# Altium PCB Flight_Computer_1.PcbDoc (part 2 of 4)
Units mm, origin at the board's own origin, x right, y up, seen from the top; angles counter-clockwise.
Board outline 101.6 x 76.2 mm, 4 copper layers (Top Layer, GND, 3.3V, Bottom Layer), stack 1.574 mm thick; 111 components, 86 nets, 493 pads, 1677 vias.
Unrouted connection lines stored in the file: 302.
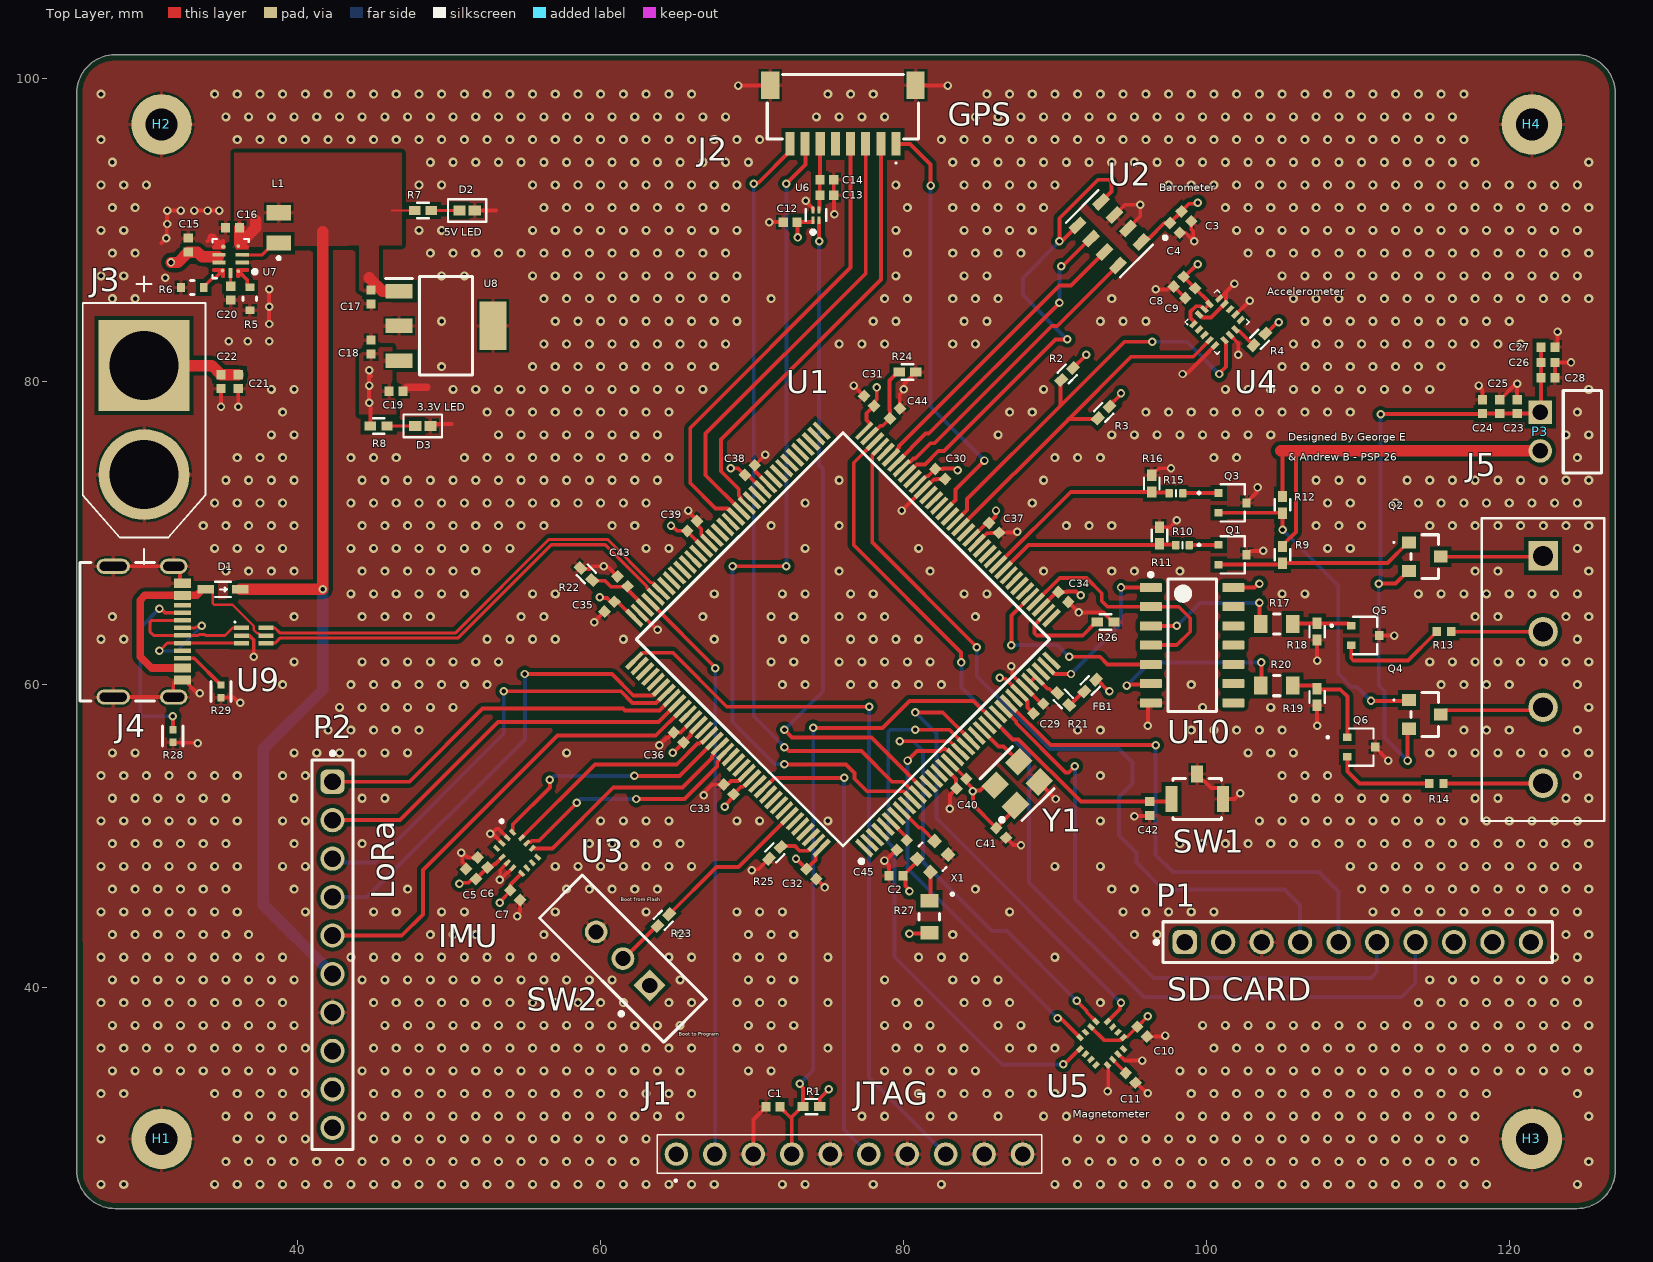
[diagram p0: Top Layer view]

## Part data (continued)
D1: library part D_Schotty_Diode, "Diode Small Signal Schottky 10V 3A Automotive 2-Pin SOD-323 T/R", Average Rectified Current=3A, Forward Voltage=320mV, LCSC Part #=C133103, Manufacturer=STMicroelectronics, Max Forward Surge Current (Ifsm)=5A, Max Junction Temperature (Tj)=150°C, Max Power Dissipation=310mW, Max Repetitive Reverse Voltage (Vrrm)=10V, Max Reverse Leakage Current=7.5µA, Min Operating Temperature=-65°C, Peak Reverse Current=2.5µA, Supplier Part Number=497-3707-1-ND, Category="Schottky Diodes", China RoHS=Compliant, ComponentLink1Description=https://datasheet.octopart.com:443/BAT60JFILM-STMicroelectronics-datasheet-56177.pdf?src-supplier=STMicroelectronics, ComponentLink1URL=https://datasheet.octopart.com:443/BAT60JFILM-STMicroelectronics-datasheet-56177.pdf?src-supplier=STMicroelectronics, ComponentLink2Description=https://datasheet.octopart.com:443/BAT60JFILM-STMicroelectronics-datasheet-12532682.pdf?src-supplier=TME, ComponentLink2URL=https://datasheet.octopart.com:443/BAT60JFILM-STMicroelectronics-datasheet-12532682.pdf?src-supplier=TME, ComponentLink3Description=https://datasheet.octopart.com:443/BAT60JFILM-STMicroelectronics-datasheet-181242469.pdf?src-supplier=Newark, ComponentLink3URL=https://datasheet.octopart.com:443/BAT60JFILM-STMicroelectronics-datasheet-181242469.pdf?src-supplier=Newark, ComponentLink4Description=https://datasheet.octopart.com:443/BAT60JFILM-STMicroelectronics-datasheet-14054140.pdf?src-supplier=iiiC, ComponentLink4URL=https://datasheet.octopart.com:443/BAT60JFILM-STMicroelectronics-datasheet-14054140.pdf?src-supplier=iiiC, Contact Plating=Tin, Current Rating=3A, Element Configuration=Single, Forward Current=3A, Height=1.17mm, Lead Free="Lead Free", Length=1.8mm, Lifecycle Status=Production, Manufacturer Part Number=BAT60JFILM, Max Operating Temperature=150°C, Max Output current=3A, Max Reverse Voltage (DC)=10V, Max Surge Current=5A, Mounting Technology="Surface Mount", Number of Elements=1, Number of Terminals=2, Output Current=3A, Packaging="Tape and Reel", Peak Non-Repetitive Surge Current=5A, Pins=2, Polarity=Standard, Pricing="1=0.29, 10=0.14, 100=0.1213, 500=0.08962, 1000=0.07938 (USD)", Radiation Hardening=No, REACH SVHC=Yes, Reverse Standoff Voltage=10V, RoHS=Compliant, Schedule B="8541100080, 8541100080|8541100080|8541100080|8541100080|8541100080|8541100080|8541100080|8541100080|8541100080|8541100080|8541100080|8541100080|8541100080|8541100080|8541100080|8541100080|8541100080|8541100080|8541100080|8541100080|8541100080|8541100080|8541100080|85", Stock=96297, Supplier=DigiKey, Voltage Rating (DC)=10V, Weight=4.535924g, Width=1.45mm
D2: library part D_RED_LED, "RED LED", LCSC Part #=C397045
D3: library part D_GREEN_LED, "Green LED", LCSC Part #=C434446
FB1: library part FB_0402, "Ferrite Beads Multi-Layer 600Ohm 25% 100MHz 300mA 520mOhm DCR 0402 Paper T/R", Case Code (Imperial)=0402, Case Code (Metric)=1005, Clock Frequency=100MHz, Current Rating=300mA, DC Resistance (DCR)=520mΩ, LCSC Part #=C76884, Manufacturer="Murata Electronics", Manufacturer Part Number=BLM15AG601SN1D, Max Operating Temperature=125°C, Min Operating Temperature=-55°C, Supplier Part Number=490-1006-1-ND, Tolerance=25%, Case/Package=0402, Category="Ferrite Beads and Chips", ComponentLink1Description=https://datasheet.octopart.com:443/BLM15AG601SN1D-Murata-datasheet-180806368.pdf?src-supplier=Newark, ComponentLink1URL=https://datasheet.octopart.com:443/BLM15AG601SN1D-Murata-datasheet-180806368.pdf?src-supplier=Newark, ComponentLink2Description=https://datasheet.octopart.com:443/BLM15AG601SN1D-Murata-datasheet-12522583.pdf?src-supplier=Upverter, ComponentLink2URL=https://datasheet.octopart.com:443/BLM15AG601SN1D-Murata-datasheet-12522583.pdf?src-supplier=Upverter, ComponentLink3Description=https://datasheet.octopart.com:443/BLM15AG601SN1D-Murata-datasheet-10083551.pdf?src-supplier=Upverter, ComponentLink3URL=https://datasheet.octopart.com:443/BLM15AG601SN1D-Murata-datasheet-10083551.pdf?src-supplier=Upverter, ComponentLink4Description=https://datasheet.octopart.com:443/BLM15AG601SN1D-Murata-datasheet-8508678.pdf?src-supplier=Upverter, ComponentLink4URL=https://datasheet.octopart.com:443/BLM15AG601SN1D-Murata-datasheet-8508678.pdf?src-supplier=Upverter, ComponentLink5Description=https://datasheet.octopart.com:443/BLM15AG601SN1D-Murata-datasheet-70271.pdf?src-supplier=element14+APAC, ComponentLink5URL=https://datasheet.octopart.com:443/BLM15AG601SN1D-Murata-datasheet-70271.pdf?src-supplier=element14+APAC, ComponentLink6Description=https://datasheet.octopart.com:443/BLM15AG601SN1D-Murata-datasheet-11772092.pdf?src-supplier=Future+Electronics, ComponentLink6URL=https://datasheet.octopart.com:443/BLM15AG601SN1D-Murata-datasheet-11772092.pdf?src-supplier=Future+Electronics, ComponentLink7Description=https://datasheet.octopart.com:443/BLM15AG601SN1D-Murata-datasheet-13536432.pdf?src-supplier=Future+Electronics, ComponentLink7URL=https://datasheet.octopart.com:443/BLM15AG601SN1D-Murata-datasheet-13536432.pdf?src-supplier=Future+Electronics, ComponentLink8Description=https://datasheet.octopart.com:443/BLM15AG601SN1D-Murata-datasheet-79879196.pdf?src-supplier=Future+Electronics, ComponentLink8URL=https://datasheet.octopart.com:443/BLM15AG601SN1D-Murata-datasheet-79879196.pdf?src-supplier=Future+Electronics, ComponentLink9Description=https://datasheet.octopart.com:443/BLM15AG601SN1D-Murata-datasheet-13563506.pdf?src-supplier=Future+Electronics, ComponentLink9URL=https://datasheet.octopart.com:443/BLM15AG601SN1D-Murata-datasheet-13563506.pdf?src-supplier=Future+Electronics, ComponentLink10Description=https://datasheet.octopart.com:443/BLM15AG601SN1D-Murata-datasheet-12545319.pdf?src-supplier=Future+Electronics, ComponentLink10URL=https://datasheet.octopart.com:443/BLM15AG601SN1D-Murata-datasheet-12545319.pdf?src-supplier=Future+Electronics, ComponentLink11Description=https://datasheet.octopart.com:443/BLM15AG601SN1D-Murata-datasheet-141257741.pdf?src-supplier=Ciiva, ComponentLink11URL=https://datasheet.octopart.com:443/BLM15AG601SN1D-Murata-datasheet-141257741.pdf?src-supplier=Ciiva, ComponentLink12Description=https://datasheet.octopart.com:443/BLM15AG601SN1D-Murata-datasheet-138706486.pdf?src-supplier=Ciiva, ComponentLink12URL=https://datasheet.octopart.com:443/BLM15AG601SN1D-Murata-datasheet-138706486.pdf?src-supplier=Ciiva, ComponentLink13Description=https://datasheet.octopart.com:443/BLM15AG601SN1D-Murata-datasheet-155367977.pdf?src-supplier=TME, ComponentLink13URL=https://datasheet.octopart.com:443/BLM15AG601SN1D-Murata-datasheet-155367977.pdf?src-supplier=TME, ComponentLink14Description=https://datasheet.octopart.com:443/BLM15AG601SN1D-Murata-datasheet-65816644.pdf?src-supplier=TME, ComponentLink14URL=https://datasheet.octopart.com:443/BLM15AG601SN1D-Murata-datasheet-65816644.pdf?src-supplier=TME, ComponentLink15Description=https://datasheet.octopart.com:443/BLM15AG601SN1D-Murata-datasheet-102761981.pdf?src-supplier=Megastar, ComponentLink15URL=https://datasheet.octopart.com:443/BLM15AG601SN1D-Murata-datasheet-102761981.pdf?src-supplier=Megastar, ComponentLink16Description=https://datasheet.octopart.com/BLM15AG601SN1D-Murata-datasheet-37129980.pdf, ComponentLink16URL=https://datasheet.octopart.com/BLM15AG601SN1D-Murata-datasheet-37129980.pdf, ComponentLink17Description=https://datasheet.octopart.com:443/BLM15AG601SN1D-Murata-datasheet-14066398.pdf?src-supplier=iiiC, ComponentLink17URL=https://datasheet.octopart.com:443/BLM15AG601SN1D-Murata-datasheet-14066398.pdf?src-supplier=iiiC, ComponentLink18Description=http://sigma.octopart.com:80/reach_statement/Murata-company-16.pdf?src-supplier=Compliance+Statements, ComponentLink18URL=http://sigma.octopart.com:80/reach_statement/Murata-company-16.pdf?src-supplier=Compliance+Statements, Core Material=Ferrite, DC Current=300mA, Depth=550µm, ESR=520mΩ, Frequency=100MHz, Height=500µm, Impedance=600Ω, Lead Free="Lead Free", Length=1mm, Lifecycle Status=Production, Material="Ferrite, Steel", Max Current Rating=300mA, Max DC Current=300mA, Military Standard=Not, Number of Circuits=1, Number of Lines=1, Number of Terminals=2, Packaging="Tape and Reel", Pins=2, Pricing="1=0.1, 10=0.043, 25=0.0376, 50=0.034, 100=0.0305, 250=0.02632, 500=0.02346, 1000=0.02083, 5000=0.01546, 10000=0.01341, 20000=0.01188 (USD)", Radiation Hardening=No, REACH SVHC=Yes, RMS Current (Irms)=300mA, RoHS=Compliant, Schedule B="8504500000, 8504500000|8504500000, 8504500000|8504500000|8504500000, 8504500000|8504500000|8504500000|8504500000", Shielding=Unshielded, Stock=347218, Supplier=DigiKey, Termination=SMD/SMT, Test Frequency=100MHz, Width=500µm
H1 H2 H3 H4: library part "M2 Mounting Hole", "2mm M2 Mounting Hole"
J1: "CONN HEADER VERT 10POS 2.54MM", Color=Black, LCSC Part #=C7128266, Manufacturer=Samtec, Manufacturer Lifecycle Status=PRODUCTION, Manufacturer_Name=SAMTEC, Max Current Rating=7.6A, Max Operating Temperature=105°C, Max Voltage Rating (AC)=550V, Min Operating Temperature=-55°C, Mouser Part Number=200-TSW11007TS, Supplier Part Number=SAM1035-10-ND, Arrow Part Number=TSW-110-07-T-S, Arrow Price/Stock=https://www.arrow.com/en/products/tsw-110-07-t-s/samtec?region=nac, Category="Headers and Wire Housings", ComponentLink1Description=https://datasheet.octopart.com:443/TSW-110-07-T-S-Samtec-datasheet-151455181.pdf?src-supplier=Upverter, ComponentLink1URL=https://datasheet.octopart.com:443/TSW-110-07-T-S-Samtec-datasheet-151455181.pdf?src-supplier=Upverter, ComponentLink2Description=https://sigma.octopart.com:443/14433679/technical_drawing/Samtec-TSW-110-07-T-S.pdf?src-supplier=Upverter, ComponentLink2URL=https://sigma.octopart.com:443/14433679/technical_drawing/Samtec-TSW-110-07-T-S.pdf?src-supplier=Upverter, ComponentLink3Description=https://datasheet.octopart.com:443/TSW-110-07-T-S-Samtec-datasheet-97325576.pdf?src-supplier=Sager+Electronics, ComponentLink3URL=https://datasheet.octopart.com:443/TSW-110-07-T-S-Samtec-datasheet-97325576.pdf?src-supplier=Sager+Electronics, ComponentLink4Description=https://sigma.octopart.com:443/97325577/technical_drawing/Samtec-TSW-110-07-T-S.pdf?src-supplier=Samtec, ComponentLink4URL=https://sigma.octopart.com:443/97325577/technical_drawing/Samtec-TSW-110-07-T-S.pdf?src-supplier=Samtec, ComponentLink5Description=https://datasheet.octopart.com:443/TSW-110-07-T-S-Samtec-datasheet-62107121.pdf?src-supplier=element14+APAC, ComponentLink5URL=https://datasheet.octopart.com:443/TSW-110-07-T-S-Samtec-datasheet-62107121.pdf?src-supplier=element14+APAC, ComponentLink6Description=https://datasheet.octopart.com:443/TSW-110-07-T-S-Samtec-datasheet-136646178.pdf?src-supplier=Master+Electronics, ComponentLink6URL=https://datasheet.octopart.com:443/TSW-110-07-T-S-Samtec-datasheet-136646178.pdf?src-supplier=Master+Electronics, ComponentLink7Description=https://datasheet.octopart.com:443/TSW-110-07-T-S-Samtec-datasheet-118235302.pdf?src-supplier=Electro+Sonic, ComponentLink7URL=https://datasheet.octopart.com:443/TSW-110-07-T-S-Samtec-datasheet-118235302.pdf?src-supplier=Electro+Sonic, ComponentLink8Description=https://datasheet.octopart.com:443/TSW-110-07-T-S-Samtec-datasheet-180258786.pdf?src-supplier=JRH+Electronics, ComponentLink8URL=https://datasheet.octopart.com:443/TSW-110-07-T-S-Samtec-datasheet-180258786.pdf?src-supplier=JRH+Electronics, ComponentLink9Description=https://datasheet.octopart.com:443/TSW-110-07-T-S-Samtec-datasheet-164324425.pdf?src-supplier=Newark, ComponentLink9URL=https://datasheet.octopart.com:443/TSW-110-07-T-S-Samtec-datasheet-164324425.pdf?src-supplier=Newark, ComponentLink10Description=https://datasheet.octopart.com:443/TSW-110-07-T-S-Samtec-datasheet-11047283.pdf?src-supplier=Newark, ComponentLink10URL=https://datasheet.octopart.com:443/TSW-110-07-T-S-Samtec-datasheet-11047283.pdf?src-supplier=Newark, ComponentLink11Description=https://datasheet.octopart.com:443/TSW-110-07-T-S-Samtec-datasheet-160657603.pdf?src-supplier=Toby+Electronics, ComponentLink11URL=https://datasheet.octopart.com:443/TSW-110-07-T-S-Samtec-datasheet-160657603.pdf?src-supplier=Toby+Electronics, ComponentLink12Description=https://datasheet.octopart.com:443/TSW-110-07-T-S-Samtec-datasheet-116539033.pdf?src-supplier=Toby+Electronics, ComponentLink12URL=https://datasheet.octopart.com:443/TSW-110-07-T-S-Samtec-datasheet-116539033.pdf?src-supplier=Toby+Electronics, ComponentLink13Description=https://datasheet.octopart.com:443/TSW-110-07-T-S-Samtec-datasheet-116536310.pdf?src-supplier=Toby+Electronics, ComponentLink13URL=https://datasheet.octopart.com:443/TSW-110-07-T-S-Samtec-datasheet-116536310.pdf?src-supplier=Toby+Electronics, ComponentLink14Description=https://datasheet.octopart.com/TSW-110-07-T-S-Samtec-datasheet-86818365.pdf, ComponentLink14URL=https://datasheet.octopart.com/TSW-110-07-T-S-Samtec-datasheet-86818365.pdf, ComponentLink15Description=https://datasheet.octopart.com:443/TSW-110-07-T-S-Samtec-datasheet-11542832.pdf?src-supplier=Arrow+Electronics, ComponentLink15URL=https://datasheet.octopart.com:443/TSW-110-07-T-S-Samtec-datasheet-11542832.pdf?src-supplier=Arrow+Electronics, ComponentLink16Description=https://datasheet.octopart.com:443/TSW-110-07-T-S-Samtec-datasheet-5313500.pdf?src-supplier=_legacy+Avnet, ComponentLink16URL=https://datasheet.octopart.com:443/TSW-110-07-T-S-Samtec-datasheet-5313500.pdf?src-supplier=_legacy+Avnet, Connector Type="Male Pin", Contact Material="Nickel, Tin", Contact Mating Length=5.842mm, Contact Plating=Tin, Datasheet Link=https://www.samtec.com/partnumber/TSW-110-07-T-S, Depth=2.54mm, Gender=Male, Height=8.71mm, Housing Color=Black, Housing Material=Polyester, Lead Free="Lead Free", Lead Pitch=2.54mm, Length=25.4mm, Lifecycle Status=Production, Manufacturer Part Number=TSW-110-07-T-S, Manufacturer_Part_Number=TSW-110-07-T-S, Mounting Technology="Through Hole", Mouser Price/Stock=https://www.mouser.co.uk/ProductDetail/Samtec/TSW-110-07-T-S?qs=rU5fayqh%252BE03fU8gEqe7bw%3D%3D, Number of Contacts=10, Number of Positions=10, Number of Rows=1, Orientation=Straight, Packaging=Bulk, Pins=10, Pitch=2.54mm, Pricing="1=0.76, 10=0.645, 100=0.5476, 500=0.48878, 1000=0.46544, 5000=0.43876 (USD)", Radiation Hardening=No, REACH SVHC=No, RoHS=Compliant, Stock=1480, Supplier=DigiKey, Termination=Solder, Width=2.54mm
J2: library part SM08B-SRSS-TB_LF__SN_, "CONN HEADER SMD R/A 8POS 1MM", Arrow Part Number=SM08B-SRSS-TB(LF)(SN), Color=Natural, Contact Resistance=40mΩ, Current Rating=1A, Dielectric Material=Polyamide, Flammability Rating="UL94 V-0", Insulation Resistance=100MΩ, LCSC Part #=C160407, Manufacturer=JST, Manufacturer_Name="JST (JAPAN SOLDERLESS TERMINALS)", Max Operating Temperature=85°C, Min Operating Temperature=-25°C, Mouser Part Number=N/A, Supplier Part Number=306-SM08BSRSSTBLFSN, Voltage Rating=50V, Arrow Price/Stock=https://www.arrow.com/en/products/sm08b-srss-tb-lf-sn/jst-manufacturing?utm_currency=USD&region=europe, Category="Headers and Wire Housings", China RoHS=Compliant, ComponentLink1Description=https://datasheet.octopart.com:443/SM08B-SRSS-TB%28LF%29%28SN%29-JST-datasheet-12489618.pdf?src-supplier=Upverter, ComponentLink1URL=https://datasheet.octopart.com:443/SM08B-SRSS-TB%28LF%29%28SN%29-JST-datasheet-12489618.pdf?src-supplier=Upverter, ComponentLink2Description=https://datasheet.octopart.com:443/SM08B-SRSS-TB%28LF%29%28SN%29-JST-datasheet-152738602.pdf?src-supplier=Upverter, ComponentLink2URL=https://datasheet.octopart.com:443/SM08B-SRSS-TB%28LF%29%28SN%29-JST-datasheet-152738602.pdf?src-supplier=Upverter, ComponentLink3Description=https://datasheet.octopart.com:443/SM08B-SRSS-TB%28LF%29%28SN%29-JST-datasheet-8330955.pdf?src-supplier=Upverter, ComponentLink3URL=https://datasheet.octopart.com:443/SM08B-SRSS-TB%28LF%29%28SN%29-JST-datasheet-8330955.pdf?src-supplier=Upverter, ComponentLink4Description=https://datasheet.octopart.com:443/SM08B-SRSS-TB%28LF%29%28SN%29-JST-datasheet-5322443.pdf?src-supplier=element14+APAC, ComponentLink4URL=https://datasheet.octopart.com:443/SM08B-SRSS-TB%28LF%29%28SN%29-JST-datasheet-5322443.pdf?src-supplier=element14+APAC, ComponentLink5Description=https://datasheet.octopart.com:443/SM08B-SRSS-TB%28LF%29%28SN%29-JST-datasheet-65849987.pdf?src-supplier=element14+APAC, ComponentLink5URL=https://datasheet.octopart.com:443/SM08B-SRSS-TB%28LF%29%28SN%29-JST-datasheet-65849987.pdf?src-supplier=element14+APAC, ComponentLink6Description=https://datasheet.octopart.com:443/SM08B-SRSS-TB%28LF%29%28SN%29-JST-datasheet-12513377.pdf?src-supplier=Future+Electronics, ComponentLink6URL=https://datasheet.octopart.com:443/SM08B-SRSS-TB%28LF%29%28SN%29-JST-datasheet-12513377.pdf?src-supplier=Future+Electronics, ComponentLink7Description=https://datasheet.octopart.com:443/SM08B-SRSS-TB/LF/SN-JST-datasheet-120967.pdf?src-supplier=Future+Electronics, ComponentLink7URL=https://datasheet.octopart.com:443/SM08B-SRSS-TB/LF/SN-JST-datasheet-120967.pdf?src-supplier=Future+Electronics, ComponentLink8Description=https://datasheet.octopart.com:443/SM08B-SRSS-TB-%28LF%29%28SN%29-JST-datasheet-44103209.pdf?src-supplier=TME, ComponentLink8URL=https://datasheet.octopart.com:443/SM08B-SRSS-TB-%28LF%29%28SN%29-JST-datasheet-44103209.pdf?src-supplier=TME, ComponentLink9Description=https://datasheet.octopart.com:443/SM08B-SRSS-TB%28LF%29%28SN%29-JST-datasheet-119911.pdf?src-supplier=DigiKey, ComponentLink9URL=https://datasheet.octopart.com:443/SM08B-SRSS-TB%28LF%29%28SN%29-JST-datasheet-119911.pdf?src-supplier=DigiKey, Connector Type="Male Pin", Contact Gender=Male, Contact Material="Copper, Tin", Contact Plating=Tin, Datasheet Link=https://www.jst-mfg.com/product/pdf/eng/eSH.pdf?681342af00cbd, Gender=Male, Height=2.95mm, Housing Color=Natural, Housing Material=Nylon, Lead Free="Lead Free", Lead Pitch=1mm, Lifecycle Status=Production, Manufacturer Part Number=SM08B-SRSS-TB(LF)(SN), Manufacturer_Part_Number=SM08B-SRSS-TB(LF)(SN), Material=Polyamide, Mounting Technology="Surface Mount", Mouser Price/Stock=https://www.mouser.co.uk/ProductDetail/JST-Commercial/SM08B-SRSS-TBLFSN?qs=QpmGXVUTftEPqGOAsnf4nQ%3D%3D, Number of Contacts=8, Number of Positions=8, Number of Rows=1, Packaging="Cut Tape", Pins=8, Pitch=990.6µm, Pricing="1=1.22, 10=1.08, 50=1.08, 100=0.922, 1000=0.813, 10000=0.691 (USD)", REACH SVHC=Yes, RoHS=Compliant, Stock=10177, Supplier=Mouser, Terminal Pitch=1mm, Termination=Solder, Voltage Rating (AC)=50V
J3: library part CMP-036-000000-1, "Plug; DC supply; XT60; male; PIN: 2; for cable; soldered; 30A; 500V", Package=Package, Check_prices=https://www.snapeda.com/parts/XT60-M/AMASS/view-part/?ref=eda, Component Type=Standard, Design Item ID=XT60-M, MF=AMASS, MP=XT60-M, Pin Count=2, SnapEDA_Link=https://www.snapeda.com/parts/XT60-M/AMASS/view-part/?ref=snap, Source=XT60-M.SchLib
J4: library part 217179-0001, "CONN RCP USB2.0 TYP C 24P SMD RA", LCSC Part #=C3197684, Manufacturer=Molex, Supplier Part Number=900-2171790001CT-ND, Category=Connectors, Manufacturer Part Number=217179-0001, Pricing="1=0.98, 10=0.731, 25=0.6564, 50=0.6074, 100=0.5642, 250=0.51468, 500=0.48234, 1200=0.44689, 2400=0.42258, 3600=0.40973, 6000=0.39484, 8400=0.38577, 12000=0.37675 (USD)", RoHS=No, Stock=11294, Supplier=Digikey
J5: library part CMP-028-000000-1, "TERM BLK 4POS SIDE ENTRY 5MM PCB", Current Rating=13.5A, LCSC Part Number=C3818021, Manufacturer="Phoenix Contact", Voltage Rating=250V, Category="Terminal Blocks", Component Type=Standard, ComponentLink1Description=https://datasheet.ciiva.com:443/pdfs/VipMasterIC/IC/PCON/PCON-S-A0009615323/PCON-S-A0009615323-1.pdf?src-supplier=IHS+Markit, ComponentLink1URL=https://datasheet.ciiva.com:443/pdfs/VipMasterIC/IC/PCON/PCON-S-A0009615323/PCON-S-A0009615323-1.pdf?src-supplier=IHS+Markit, ComponentLink2Description=https://datasheet.ciiva.com/824/1729034-824323.pdf?src-supplier=Digikey, ComponentLink2URL=https://datasheet.ciiva.com/824/1729034-824323.pdf?src-supplier=Digikey, ComponentLink3Description=https://datasheet.ciiva.com/16071/1729034-16071818.pdf?src-supplier=Onlinecomponents.com, ComponentLink3URL=https://datasheet.ciiva.com/16071/1729034-16071818.pdf?src-supplier=Onlinecomponents.com, ComponentLink4Description=https://datasheet.ciiva.com/15225/getdatasheetpartid-305793-15225961.pdf?src-supplier=Verical, ComponentLink4URL=https://datasheet.ciiva.com/15225/getdatasheetpartid-305793-15225961.pdf?src-supplier=Verical, ComponentLink5Description=https://datasheet.ciiva.com/14110/mkdsn-series-eng-bro-14110735.pdf?src-supplier=Distrelec, ComponentLink5URL=https://datasheet.ciiva.com/14110/mkdsn-series-eng-bro-14110735.pdf?src-supplier=Distrelec, ComponentLink6Description=https://datasheet.ciiva.com/14608/70054377-14608714.pdf?src-supplier=Allied+Electronics, ComponentLink6URL=https://datasheet.ciiva.com/14608/70054377-14608714.pdf?src-supplier=Allied+Electronics, Design Item ID=1729034, Fastening Method=SCREW, Manufacturer Part Number=1729034, Mounting Technology=Board, Number of Decks=1, Number of Rows=1, Number of Ways=4, Pin Count=4, Pricing="1=2.26, 10=2.162, 50=2.068, 100=2.0116, 250=1.88, 500=1.7296, 1000=1.59801, 2500=1.5275 (USD)", Reach SVHC Compliant=No, RoHS=Yes, RoHS Compliant=Yes, Safety Approval=UL, Source=Hybrids_Avionics.SCHLIB, Stock=23266, Terminal and Terminal Block Type="BARRIER STRIP TERMINAL BLOCK", Wire Cross Section=1.5mm2, Wire/Cable Gauge=16AWG
L1: library part L_1uH_2016, "FIXED IND 1UH 1.7A 128 MOHM SMD", Ambient Temperature Range High=85°C, Case/Package=0806, Current Rating=1.7A, DC Resistance (DCR)=140mΩ, Inductance Tolerance=20%, LCSC Part #=C560043, Manufacturer=Murata, Manufacturer Lifecycle Status="IN PRODUCTION", Manufacturer Part Number=DFE201610E-2R2M=P2, Max Operating Temperature=125°C, Min Operating Temperature=-40°C, Saturation Current=2.4A, Supplier Part Number=490-17728-1-ND, Test Frequency=1MHz, Category="Fixed Inductors", ComponentLink1Description=https://datasheet.octopart.com:443/DFE18SAN1R0MG0L-Murata-datasheet-141261288.pdf?src-supplier=Ciiva, ComponentLink1URL=https://datasheet.octopart.com:443/DFE18SAN1R0MG0L-Murata-datasheet-141261288.pdf?src-supplier=Ciiva, ComponentLink2Description=https://datasheet.octopart.com:443/DFE18SAN1R0MG0L-Murata-datasheet-140650244.pdf?src-supplier=Ciiva, ComponentLink2URL=https://datasheet.octopart.com:443/DFE18SAN1R0MG0L-Murata-datasheet-140650244.pdf?src-supplier=Ciiva, ComponentLink3Description=https://datasheet.octopart.com:443/DFE18SAN1R0MG0L-Murata-datasheet-138707311.pdf?src-supplier=Ciiva, ComponentLink3URL=https://datasheet.octopart.com:443/DFE18SAN1R0MG0L-Murata-datasheet-138707311.pdf?src-supplier=Ciiva, ComponentLink4Description=https://datasheet.octopart.com:443/DFE18SAN1R0MG0L-Murata-datasheet-140568518.pdf?src-supplier=Arrow.cn, ComponentLink4URL=https://datasheet.octopart.com:443/DFE18SAN1R0MG0L-Murata-datasheet-140568518.pdf?src-supplier=Arrow.cn, ComponentLink5Description=https://datasheet.octopart.com:443/DFE18SAN1R0MG0L-Murata-datasheet-169352396.pdf?src-supplier=Arrow.cn, ComponentLink5URL=https://datasheet.octopart.com:443/DFE18SAN1R0MG0L-Murata-datasheet-169352396.pdf?src-supplier=Arrow.cn, ComponentLink6Description=https://datasheet.octopart.com:443/DFE18SAN1R0MG0L-Murata-datasheet-145448863.pdf?src-supplier=Geoflip, ComponentLink6URL=https://datasheet.octopart.com:443/DFE18SAN1R0MG0L-Murata-datasheet-145448863.pdf?src-supplier=Geoflip, ComponentLink7Description=http://sigma.octopart.com:80/reach_statement/Murata-company-16.pdf?src-supplier=Compliance+Statements, ComponentLink7URL=http://sigma.octopart.com:80/reach_statement/Murata-company-16.pdf?src-supplier=Compliance+Statements, Composition=Wirewound, Core Material=Metal, ESR=140mΩ, Height=1mm, Lifecycle Status=Production, Max Current Rating=1.7A, Number of Circuits=1, Number of Terminals=2, Packaging="Cut Tape", Pricing="1=0.24, 10=0.2, 100=0.1645, 1000=0.13528 (USD)", REACH SVHC=Yes, RMS Current (Irms)=1.7A, RoHS=Compliant, Schedule B=8504500000, Shielding=Yes, Stock=158333, Supplier=DigiKey, Tolerance=20%, Width=1.6mm
P1 P2: library part CMP-1502-01082-6, "THT Vertical Pin Header WR-PHD, Pitch 2.54 mm, Single Row, 10 pins", Color=Black, Contact Resistance=20mΩ, Current Rating=3A, Flammability Rating="UL94 V-0", Insulation Resistance=1GΩ, Max Operating Temperature=105°C, Min Operating Temperature=-40°C, Operating Supply Voltage=250V, Connector Type="Male Pin", Contact Gender=Male, Contact Material=Gold, Contact Mating Length=5.9944mm, Contact Plating=Gold, Gender=Male, Height=8.74mm, Housing Material=PBT, Lead Pitch=2.54mm, Length=2.54mm, Mount="Through Hole", Number of Contacts=10, Number of Pins=10, Number of Positions=10, Number of Rows=1, Orientation=Vertical, Packaging=Bulk, Pitch=2.54mm, RoHS=Compliant, Termination=Solder, Voltage Rating=250V, Width=25.4mm
P3: library part CMP-1024-00317-1, "0.025\" SQ Post Header, Through-hole, Right Angle, -55 to 125 degC, 2.54 mm Pitch, 2-Pin, Male, RoHS", Manufacturer=Samtec, Temperature Range="-55 to 125 degC", ComponentLink1Description="Manufacturer URL", ComponentLink1URL=http://www.samtec.com, ComponentLink2Description=Datasheet, ComponentLink2URL=http://www.samtec.com/documents/webfiles/pdf/TSW_TH.PDF, ComponentLink3Description="Package Specification", ComponentLink3URL=http://www.samtec.com/documents/webfiles/cpdf/TSW-XXX-XX-XXX-X-XX-XXX-MKT.pdf, DatasheetVersion=F-214, Mounting Technology=Through-hole, Orientation="Right Angle", PackageDescription=".025[0.64] SQ. Post Terminal Strip Assembly", PackageReference=TSW-102-08-X-S-NA, PackageVersion="DM, 8/1988", PartNumber=TSW-102-08-F-S-NA, Pitch="2.54 mm", RoHS=True
Q1 Q3 Q5 Q6: library part CMP-011-00020-2, "MOSFET N-CH 20V 2.2A SOT323", Case/Package=SOT-323, Max Operating Temperature=150°C, Min Operating Temperature=-55°C, Mounting Technology="Surface Mount", Pins=3
Q2: library part CMP-028-000006-1, "MOSFET (P-Channel)", Manufacturer_Name=Toshiba, Mouser Part Number=757-SSM3J372RLF, Arrow Part Number=SSM3J372R,LF, Arrow Price/Stock=null?utm_currency=USD&region=nac, Component Type=Standard, Datasheet Link=https://toshiba.semicon-storage.com/ap-en/semiconductor/product/mosfets/detail.SSM3J372R.html, Design Item ID=SSM3J372R,LF, Height=0.88mm, Manufacturer_Part_Number=SSM3J372R,LF, Mouser Price/Stock=https://www.mouser.co.uk/ProductDetail/Toshiba/SSM3J372RLF?qs=u16ybLDytRbJaSMlwq9MLA%3D%3D, Pin Count=3, Source=Hybrids_Avionics.SCHLIB
Q4: library part CMP-028-000014-1, "MOSFET (P-Channel)", Manufacturer_Name=Toshiba, Mouser Part Number=757-SSM3J372RLF, Arrow Part Number=SSM3J372R,LF, Arrow Price/Stock=null?utm_currency=USD&region=nac, Component Type=Standard, Datasheet Link=https://toshiba.semicon-storage.com/ap-en/semiconductor/product/mosfets/detail.SSM3J372R.html, Design Item ID=SSM3J372R,LF, Height=0.88mm, Manufacturer_Part_Number=SSM3J372R,LF, Mouser Price/Stock=https://www.mouser.co.uk/ProductDetail/Toshiba/SSM3J372RLF?qs=u16ybLDytRbJaSMlwq9MLA%3D%3D, Pin Count=3, Source=Hybrids_Avionics.SCHLIB
R1 R4 R9 R11 R12 R16 R18 R19 R23: library part R_10k_0402, "RES SMD 10K OHM 0.1% 1/16W 0402", Case Code (Imperial)=0402, LCSC Part #=C191915, Manufacturer="Yageo Group", Manufacturer Part Number=RC0402FR-071KL, Max Operating Temperature=155°C, Max Power Dissipation=63mW, Min Operating Temperature=-55°C, Power Dissipation=62.5mW, Supplier Part Number=311-1.00KLRTR-ND, Temperature Coefficient=100ppm/°C, Tolerance=1%, Voltage Rating=50V, Case Code (Metric)=0402, Case/Package=0402, Category="Chip SMD Resistors", China RoHS=Non-Compliant, ComponentLink1Description=https://datasheet.octopart.com:443/RC0402FR-071KL-Yageo-datasheet-175887523.pdf?src-supplier=IHS, ComponentLink1URL=https://datasheet.octopart.com:443/RC0402FR-071KL-Yageo-datasheet-175887523.pdf?src-supplier=IHS, ComponentLink2Description=https://datasheet.octopart.com:443/RC0402FR-071KL-Yageo-datasheet-164759695.pdf?src-supplier=Upverter, ComponentLink2URL=https://datasheet.octopart.com:443/RC0402FR-071KL-Yageo-datasheet-164759695.pdf?src-supplier=Upverter, ComponentLink3Description=https://datasheet.octopart.com:443/RC0402FR-071KL-Yageo-datasheet-103092701.pdf?src-supplier=Upverter, ComponentLink3URL=https://datasheet.octopart.com:443/RC0402FR-071KL-Yageo-datasheet-103092701.pdf?src-supplier=Upverter, ComponentLink4Description=https://sigma.octopart.com:443/138820526/technical_drawing/Yageo-RC0402FR-071KL.pdf?src-supplier=Upverter, ComponentLink4URL=https://sigma.octopart.com:443/138820526/technical_drawing/Yageo-RC0402FR-071KL.pdf?src-supplier=Upverter, ComponentLink5Description=https://datasheet.octopart.com:443/RC0402FR-071KL-Yageo-datasheet-98239111.pdf?src-supplier=Upverter, ComponentLink5URL=https://datasheet.octopart.com:443/RC0402FR-071KL-Yageo-datasheet-98239111.pdf?src-supplier=Upverter, ComponentLink6Description=https://datasheet.octopart.com:443/RC0402FR-071KL-Yageo-datasheet-10408619.pdf?src-supplier=Newark, ComponentLink6URL=https://datasheet.octopart.com:443/RC0402FR-071KL-Yageo-datasheet-10408619.pdf?src-supplier=Newark, ComponentLink7Description=https://datasheet.octopart.com:443/RC0402FR-071KL-Yageo-datasheet-8324527.pdf?src-supplier=Newark, ComponentLink7URL=https://datasheet.octopart.com:443/RC0402FR-071KL-Yageo-datasheet-8324527.pdf?src-supplier=Newark, ComponentLink8Description=https://datasheet.octopart.com:443/RC0402FR-071KL-Yageo-datasheet-62067350.pdf?src-supplier=Farnell, ComponentLink8URL=https://datasheet.octopart.com:443/RC0402FR-071KL-Yageo-datasheet-62067350.pdf?src-supplier=Farnell, ComponentLink9Description=https://datasheet.octopart.com:443/RC0402FR-071KL-Yageo-datasheet-12531192.pdf?src-supplier=Future+Electronics, ComponentLink9URL=https://datasheet.octopart.com:443/RC0402FR-071KL-Yageo-datasheet-12531192.pdf?src-supplier=Future+Electronics, ComponentLink10Description=https://datasheet.octopart.com:443/RC0402FR-071KL-Yageo-datasheet-137700087.pdf?src-supplier=Future+Electronics, ComponentLink10URL=https://datasheet.octopart.com:443/RC0402FR-071KL-Yageo-datasheet-137700087.pdf?src-supplier=Future+Electronics, ComponentLink11Description=https://datasheet.octopart.com:443/RC0402FR-071KL-Yageo-datasheet-8324255.pdf?src-supplier=Future+Electronics, ComponentLink11URL=https://datasheet.octopart.com:443/RC0402FR-071KL-Yageo-datasheet-8324255.pdf?src-supplier=Future+Electronics, ComponentLink12Description=https://datasheet.octopart.com:443/RC0402FR-071KL-Yageo-datasheet-8329306.pdf?src-supplier=element14, ComponentLink12URL=https://datasheet.octopart.com:443/RC0402FR-071KL-Yageo-datasheet-8329306.pdf?src-supplier=element14, ComponentLink13Description=https://datasheet.octopart.com:443/RC0402FR-071KL-Yageo-datasheet-505231.pdf?src-supplier=element14, ComponentLink13URL=https://datasheet.octopart.com:443/RC0402FR-071KL-Yageo-datasheet-505231.pdf?src-supplier=element14, ComponentLink14Description=https://datasheet.octopart.com:443/RC0402FR-071KL-Yageo-datasheet-175423674.pdf?src-supplier=SOS+electronic, ComponentLink14URL=https://datasheet.octopart.com:443/RC0402FR-071KL-Yageo-datasheet-175423674.pdf?src-supplier=SOS+electronic, ComponentLink15Description=https://datasheet.octopart.com:443/RC0402FR-071KL-Yageo-datasheet-148775077.pdf?src-supplier=TME, ComponentLink15URL=https://datasheet.octopart.com:443/RC0402FR-071KL-Yageo-datasheet-148775077.pdf?src-supplier=TME, ComponentLink16Description=https://datasheet.octopart.com:443/RC0402FR-071KL-Yageo-datasheet-79472498.pdf?src-supplier=Megastar, ComponentLink16URL=https://datasheet.octopart.com:443/RC0402FR-071KL-Yageo-datasheet-79472498.pdf?src-supplier=Megastar, ComponentLink17Description=https://datasheet.octopart.com/RC0402FR-071KL-Yageo-datasheet-73766026.pdf, ComponentLink17URL=https://datasheet.octopart.com/RC0402FR-071KL-Yageo-datasheet-73766026.pdf, ComponentLink18Description=http://sigma.octopart.com:80/rohs_statement/Yageo-company-2.pdf?src-supplier=Compliance+Statements, ComponentLink18URL=http://sigma.octopart.com:80/rohs_statement/Yageo-company-2.pdf?src-supplier=Compliance+Statements, ComponentLink19Description=http://sigma.octopart.com:80/conflict_mineral_statement/Yageo-company-3.pdf?src-supplier=Compliance+Statements, ComponentLink19URL=http://sigma.octopart.com:80/conflict_mineral_statement/Yageo-company-3.pdf?src-supplier=Compliance+Statements, ComponentLink20Description=https://sigma.octopart.com:443/138766958/technical_drawing/Panasonic-ERA-2AEB103X.pdf?src-supplier=Upverter, ComponentLink20URL=https://sigma.octopart.com:443/138766958/technical_drawing/Panasonic-ERA-2AEB103X.pdf?src-supplier=Upverter, ComponentLink21Description=https://datasheet.octopart.com:443/ERA-2AEB103X-Panasonic-datasheet-62287448.pdf?src-supplier=Future+Electronics, ComponentLink21URL=https://datasheet.octopart.com:443/ERA-2AEB103X-Panasonic-datasheet-62287448.pdf?src-supplier=Future+Electronics, ComponentLink22Description=https://datasheet.octopart.com:443/ERA-2AEB103X-Panasonic-datasheet-12510007.pdf?src-supplier=Future+Electronics, ComponentLink22URL=https://datasheet.octopart.com:443/ERA-2AEB103X-Panasonic-datasheet-12510007.pdf?src-supplier=Future+Electronics, ComponentLink23Description=https://datasheet.octopart.com:443/ERA-2AEB103X-Panasonic-datasheet-11763931.pdf?src-supplier=Future+Electronics, ComponentLink23URL=https://datasheet.octopart.com:443/ERA-2AEB103X-Panasonic-datasheet-11763931.pdf?src-supplier=Future+Electronics, ComponentLink24Description=https://datasheet.octopart.com:443/ERA-2AEB103X-Panasonic-datasheet-10840895.pdf?src-supplier=Future+Electronics, ComponentLink24URL=https://datasheet.octopart.com:443/ERA-2AEB103X-Panasonic-datasheet-10840895.pdf?src-supplier=Future+Electronics, ComponentLink25Description=https://datasheet.octopart.com:443/ERA-2AEB103X-Panasonic-datasheet-8367715.pdf?src-supplier=Future+Electronics, ComponentLink25URL=https://datasheet.octopart.com:443/ERA-2AEB103X-Panasonic-datasheet-8367715.pdf?src-supplier=Future+Electronics, ComponentLink26Description=https://datasheet.octopart.com:443/ERA-2AEB103X-Panasonic-datasheet-5392808.pdf?src-supplier=Future+Electronics, ComponentLink26URL=https://datasheet.octopart.com:443/ERA-2AEB103X-Panasonic-datasheet-5392808.pdf?src-supplier=Future+Electronics, ComponentLink27Description=https://datasheet.octopart.com:443/ERA-2AEB103X-Panasonic-datasheet-136531316.pdf?src-supplier=TME, ComponentLink27URL=https://datasheet.octopart.com:443/ERA-2AEB103X-Panasonic-datasheet-136531316.pdf?src-supplier=TME, ComponentLink28Description=https://datasheet.octopart.com:443/ERA2AEB103X-Panasonic-datasheet-188913046.pdf?src-supplier=TME, ComponentLink28URL=https://datasheet.octopart.com:443/ERA2AEB103X-Panasonic-datasheet-188913046.pdf?src-supplier=TME, ComponentLink29Description=https://datasheet.octopart.com:443/ERA-2AEB103X-Panasonic-datasheet-13266200.pdf?src-supplier=_legacy+Avnet, ComponentLink29URL=https://datasheet.octopart.com:443/ERA-2AEB103X-Panasonic-datasheet-13266200.pdf?src-supplier=_legacy+Avnet, ComponentLink30Description=https://datasheet.octopart.com:443/ERA2AEB103X-Panasonic-datasheet-5311861.pdf?src-supplier=Newark, ComponentLink30URL=https://datasheet.octopart.com:443/ERA2AEB103X-Panasonic-datasheet-5311861.pdf?src-supplier=Newark, ComponentLink31Description=https://datasheet.octopart.com:443/ERA-2AEB103X-Panasonic-datasheet-61114971.pdf?src-supplier=Newark, ComponentLink31URL=https://datasheet.octopart.com:443/ERA-2AEB103X-Panasonic-datasheet-61114971.pdf?src-supplier=Newark, ComponentLink32Description=https://datasheet.octopart.com:443/ERA-2AEB103X-Panasonic-datasheet-34200419.pdf?src-supplier=Newark, ComponentLink32URL=https://datasheet.octopart.com:443/ERA-2AEB103X-Panasonic-datasheet-34200419.pdf?src-supplier=Newark, ComponentLink33Description=https://datasheet.octopart.com:443/ERA-2AEB103X-Panasonic-datasheet-7542722.pdf?src-supplier=element14+APAC, ComponentLink33URL=https://datasheet.octopart.com:443/ERA-2AEB103X-Panasonic-datasheet-7542722.pdf?src-supplier=element14+APAC, ComponentLink34Description=https://datasheet.octopart.com:443/ERA-2AEB103X-Panasonic-datasheet-154766165.pdf?src-supplier=Master+Electronics, ComponentLink34URL=https://datasheet.octopart.com:443/ERA-2AEB103X-Panasonic-datasheet-154766165.pdf?src-supplier=Master+Electronics, ComponentLink35Description=https://datasheet.octopart.com:443/ERA-2AEB103X-Panasonic-datasheet-46744048.pdf?src-supplier=RS+(Formerly+Allied+Electronics), ComponentLink35URL=https://datasheet.octopart.com:443/ERA-2AEB103X-Panasonic-datasheet-46744048.pdf?src-supplier=RS+(Formerly+Allied+Electronics), ComponentLink36Description=https://sigma.octopart.com:443/150570796/technical_drawing/Panasonic-ERA2AEB103X.pdf?src-supplier=Panasonic+SCT, ComponentLink36URL=https://sigma.octopart.com:443/150570796/technical_drawing/Panasonic-ERA2AEB103X.pdf?src-supplier=Panasonic+SCT, ComponentLink37Description=https://datasheet.octopart.com/ERA-2AEB103X-Panasonic-datasheet-78375410.pdf, ComponentLink37URL=https://datasheet.octopart.com/ERA-2AEB103X-Panasonic-datasheet-78375410.pdf, ComponentLink38Description=https://datasheet.octopart.com:443/ERA2AEB103X-Panasonic---ECG-datasheet-15994758.pdf?src-supplier=Farnell, ComponentLink38URL=https://datasheet.octopart.com:443/ERA2AEB103X-Panasonic---ECG-datasheet-15994758.pdf?src-supplier=Farnell, ComponentLink39Description=https://datasheet.octopart.com:443/ERA2AEB103X-Panasonic-datasheet-10050158.pdf?src-supplier=Arrow+Electronics, ComponentLink39URL=https://datasheet.octopart.com:443/ERA2AEB103X-Panasonic-datasheet-10050158.pdf?src-supplier=Arrow+Electronics, ComponentLink40Description=https://datasheet.octopart.com:443/ERA-2AEB103X-Panasonic-datasheet-33006989.pdf?src-supplier=Electro+Sonic, ComponentLink40URL=https://datasheet.octopart.com:443/ERA-2AEB103X-Panasonic-datasheet-33006989.pdf?src-supplier=Electro+Sonic, Composition="Thick Film", Contact Plating=Tin, Depth=500µm, Features="Automotive AEC-Q200", Height=350µm, Lead Free="Lead Free", Length=1mm, Lifecycle Status=Production, Military Standard=Not, Mounting Technology="Surface Mount", Number of Terminals=2, Number of Terminations=2, Packaging="Tape & Reel", Pins=2, Power Rating=63mW, Pricing="10000=0.00204, 20000=0.002, 30000=0.00196, 50000=0.00182, 70000=0.00181 (USD)", Radiation Hardening=No, REACH SVHC=Yes, RoHS=Compliant, Schedule B="8533210045, 8533210045|8533210045|8533210045|8533210045|8533210045|8533210045|8533210045|8533210045|8533210045|8533210045|8533210045|8533210045|8533210045|8533210045|8533210045|8533210045|8533210045|8533210045|8533210045|8533210045|8533210045|8533210045|8533210045|85", Stock=4926888, Supplier=DigiKey, Termination=SMD/SMT, Voltage Rating (AC)=50V, Voltage Rating (DC)=50V, Width=500µm, Working Voltage=50V
R2 R3: library part R_4K7_0402_1, "RES 4.7K OHM 1% 1/16W 0402", Ambient Temperature Range High=70°C, Case/Package=0402, LCSC Part #=C2073585, Manufacturer="TE Connectivity", Manufacturer Lifecycle Status=ACTIVE, Manufacturer Part Number=CRGCQ0402F4K7, Max Operating Temperature=155°C, Min Operating Temperature=-55°C, Operating Supply Voltage=50V, Power Dissipation=63mW, Power Rating=62.5mW, Supplier Part Number=A129635CT-ND, Temperature Coefficient=100ppm/°C, Tolerance=1%, Category="Chip SMD Resistors", China RoHS=Non-Compliant, ComponentLink1Description=https://datasheet.octopart.com:443/CRGCQ0402F4K7-TE-Connectivity-datasheet-114679081.pdf?src-supplier=Master+Electronics, ComponentLink1URL=https://datasheet.octopart.com:443/CRGCQ0402F4K7-TE-Connectivity-datasheet-114679081.pdf?src-supplier=Master+Electronics, ComponentLink2Description=https://datasheet.octopart.com:443/3-2176337-3-TE-Connectivity---AMP-datasheet-189108688.pdf?src-supplier=Master+Electronics, ComponentLink2URL=https://datasheet.octopart.com:443/3-2176337-3-TE-Connectivity---AMP-datasheet-189108688.pdf?src-supplier=Master+Electronics, ComponentLink3Description=https://datasheet.octopart.com:443/CRGCQ0402F4K7-TE-Connectivity-datasheet-179146952.pdf?src-supplier=IHS, ComponentLink3URL=https://datasheet.octopart.com:443/CRGCQ0402F4K7-TE-Connectivity-datasheet-179146952.pdf?src-supplier=IHS, ComponentLink4Description=https://sigma.octopart.com:443/114679084/technical_drawing/TE-Connectivity-CRGCQ0402F4K7.pdf?src-supplier=Sager+Electronics, ComponentLink4URL=https://sigma.octopart.com:443/114679084/technical_drawing/TE-Connectivity-CRGCQ0402F4K7.pdf?src-supplier=Sager+Electronics, ComponentLink5Description=http://sigma.octopart.com:80/117256993/reach_statement/TE-Connectivity-CRGCQ0402F4K7.pdf?src-supplier=Compliance+Statements, ComponentLink5URL=http://sigma.octopart.com:80/117256993/reach_statement/TE-Connectivity-CRGCQ0402F4K7.pdf?src-supplier=Compliance+Statements, Composition="Thick Film", Height=350µm, Lifecycle Status=Production, Mounting Technology="Surface Mount", Number of Terminals=2, Packaging="Cut Tape", Pricing="1=0.1, 10=0.025, 25=0.0184, 50=0.0148, 100=0.0121, 250=0.00936, 500=0.00784, 1000=0.00663, 5000=0.00473 (USD)", REACH SVHC=Yes, RoHS=Compliant, Schedule B="8533210025, 8533210025|8533210025|8533210025|8533210025|8533210025, 8533210045", Stock=1741618, Supplier=DigiKey, Voltage Rating=50V, Voltage Rating (DC)=50V, Width=500µm, Working Voltage=50V
R5 R6: library part CMP-04015-087673-1, "40.2kΩ ±0.5% 0.1W Chip Resistor 0603 Thick Film AEC-Q200 Qualified / RK73H1JTTD4022D", Case Code (Imperial)=0603, Case Code (Metric)=1608, Max Operating Temperature=155°C, Min Operating Temperature=-55°C, Package Quantity=5000, Power Rating=100mW, Resistance=40.2kR, Temperature Coefficient=100ppm/°C, Tolerance=0.5%, Voltage Rating=50V, Case/Package=0603, Height=0.45mm, Lead Free="Lead Free", Length=1.6mm, Packaging="Tape and Reel", Series=RK73H, Termination=SMD/SMT, Voltage Rating (DC)=50V, Width=0.8mm
R7: library part R_5K1_0402, "Res Thick Film 0402 5.1K Ohm 1% 0.063W(1/16W) ±100ppm/C Pad SMD T/R", Case Code (Imperial)=0402, Case Code (Metric)=1005, LCSC Part #=C4346772, Manufacturer="Yageo Group", Manufacturer Part Number=RC0402FR-135K1L, Max Operating Temperature=155°C, Min Operating Temperature=-55°C, Power Dissipation=62.5mW, Supplier Part Number=13-RC0402FR-135K1LCT-ND, Temperature Coefficient=100ppm/°C, Tolerance=1%, Voltage Rating=50V, Case/Package=0402, Category="Chip SMD Resistors", China RoHS=Non-Compliant, ComponentLink1Description=https://datasheet.octopart.com:443/RC0402FR-135K1L-Yageo-datasheet-175887523.pdf?src-supplier=IHS, ComponentLink1URL=https://datasheet.octopart.com:443/RC0402FR-135K1L-Yageo-datasheet-175887523.pdf?src-supplier=IHS, ComponentLink2Description=https://datasheet.octopart.com:443/RC0402FR-135K1L-Yageo-datasheet-164759695.pdf?src-supplier=Future+Electronics, ComponentLink2URL=https://datasheet.octopart.com:443/RC0402FR-135K1L-Yageo-datasheet-164759695.pdf?src-supplier=Future+Electronics, ComponentLink3Description=https://datasheet.octopart.com/RC0402FR-135K1L-Yageo-datasheet-73766026.pdf, ComponentLink3URL=https://datasheet.octopart.com/RC0402FR-135K1L-Yageo-datasheet-73766026.pdf, ComponentLink4Description=https://datasheet.octopart.com:443/RC0402FR-135K1L-Yageo-datasheet-10408619.pdf?src-supplier=_legacy+Avnet, ComponentLink4URL=https://datasheet.octopart.com:443/RC0402FR-135K1L-Yageo-datasheet-10408619.pdf?src-supplier=_legacy+Avnet, ComponentLink5Description=http://sigma.octopart.com:80/rohs_statement/Yageo-company-2.pdf?src-supplier=Compliance+Statements, ComponentLink5URL=http://sigma.octopart.com:80/rohs_statement/Yageo-company-2.pdf?src-supplier=Compliance+Statements, ComponentLink6Description=http://sigma.octopart.com:80/conflict_mineral_statement/Yageo-company-3.pdf?src-supplier=Compliance+Statements, ComponentLink6URL=http://sigma.octopart.com:80/conflict_mineral_statement/Yageo-company-3.pdf?src-supplier=Compliance+Statements, Composition="Thick Film", Contact Plating=Tin, Height=350µm, Length=1mm, Lifecycle Status=Production, Mounting Technology="Surface Mount", Number of Terminals=2, Packaging="Tape & Reel", Power Rating=62.5mW, Pricing="1=0.1, 10=0.005, 25=0.0044, 50=0.004, 100=0.0036, 250=0.00328 (USD)", Radiation Hardening=No, REACH SVHC=Yes, RoHS=Compliant, Stock=220857, Supplier=DigiKey, Termination=SMD/SMT, Width=500µm, Working Voltage=50V